# EAGLE board 8x8_Neopixel_emptyboard (EAGLE 8.2.0)
REV: B

No outline drawn. Coordinates in mm, seen from the top.
Copper layers (1*16): Top 0.035mm / dielectric 1.5mm / Bottom 0.035mm
Design rules "adafruit": minimum track width 8mil, minimum drill 15.5mil, track to track 8mil, track to pad 8mil, pad to pad 8mil, via to via 8mil, smd to smd 8mil, copper to edge 10mil, drill to drill 8mil, minimum pad ring 10mil, minimum via ring 8mil, stop-mask expansion 2mil, vias tented up to drill 20mil, thermal gap 10mil
Holes 2.8 mm at 2.48,-17.72 2.48,-35.5 2.48,-53.28 68.52,-53.28 68.52,-35.5 68.52,-17.72 26.61,-8.83 44.39,-8.83 26.61,-35.5 44.39,-35.5 26.61,-62.17 44.39,-62.17

## Footprints (pad centres in the part's own frame; a part is rotated, then mirrored left to right if it is on the bottom)
1X03 = drill 1.016 pad 1.88: 1 0,0; 2 2.54,0; 3 5.08,0
TESTPOINT_SMT = smd 4.7 x 3.4: P$1 0,0

## Placement (x,y rotation side)
JP1  [1X03]  1.84,-8.83 0 top
JP2  [1X03]  68.9,-62.17 180 top
TP1  [TESTPOINT_SMT]  44.39,-68.65 270 bottom
TP2  [TESTPOINT_SMT]  2.35,-44.39 0 bottom
TP3  [TESTPOINT_SMT]  62.17,-2.35 270 bottom
TP4  [TESTPOINT_SMT]  68.65,-8.83 0 bottom
TP5  [TESTPOINT_SMT]  62.17,-68.65 270 bottom
TP6  [TESTPOINT_SMT]  68.65,-26.61 0 bottom
TP7  [TESTPOINT_SMT]  44.39,-2.35 270 bottom
TP8  [TESTPOINT_SMT]  68.65,-44.39 0 bottom
TP9  [TESTPOINT_SMT]  8.83,-68.65 270 bottom
TP10  [TESTPOINT_SMT]  8.83,-2.35 270 bottom
TP11  [TESTPOINT_SMT]  26.61,-68.65 270 bottom
TP12  [TESTPOINT_SMT]  2.35,-62.17 0 bottom
TP13  [TESTPOINT_SMT]  26.61,-2.35 270 bottom
TP14  [TESTPOINT_SMT]  2.35,-26.61 0 bottom

## Library data of the parts
JP1 JP2 = neomatrix-8x8
TP1-TP14 = microbuilder

## Nets
GND: JP1.3 JP2.3 TP1.P$1 TP2.P$1 TP3.P$1 TP4.P$1 TP5.P$1 TP6.P$1 TP7.P$1 TP8.P$1 TP9.P$1 TP10.P$1 TP11.P$1 TP12.P$1 TP13.P$1 TP14.P$1
N$10: JP1.1

## Tracks (layer width: path | path; a pad name or v marks a point on that pad's centre or on a via)
GND  (15 unrouted)
N$10  (3 unrouted)

## Text on the board
bPlace: DIN | 5V | GND | GND | 5V | DOUT